# Altium PCB PCB1.PcbDoc
Units mm, origin at the board's own origin, x right, y up, seen from the top; angles counter-clockwise.
Board outline 60.4 x 38.1 mm, 4 copper layers (Top Layer, Internal Plane 1, Internal Plane 2, Bottom Layer), stack 1.537 mm thick; 83 components, 66 nets, 329 pads, 107 vias.
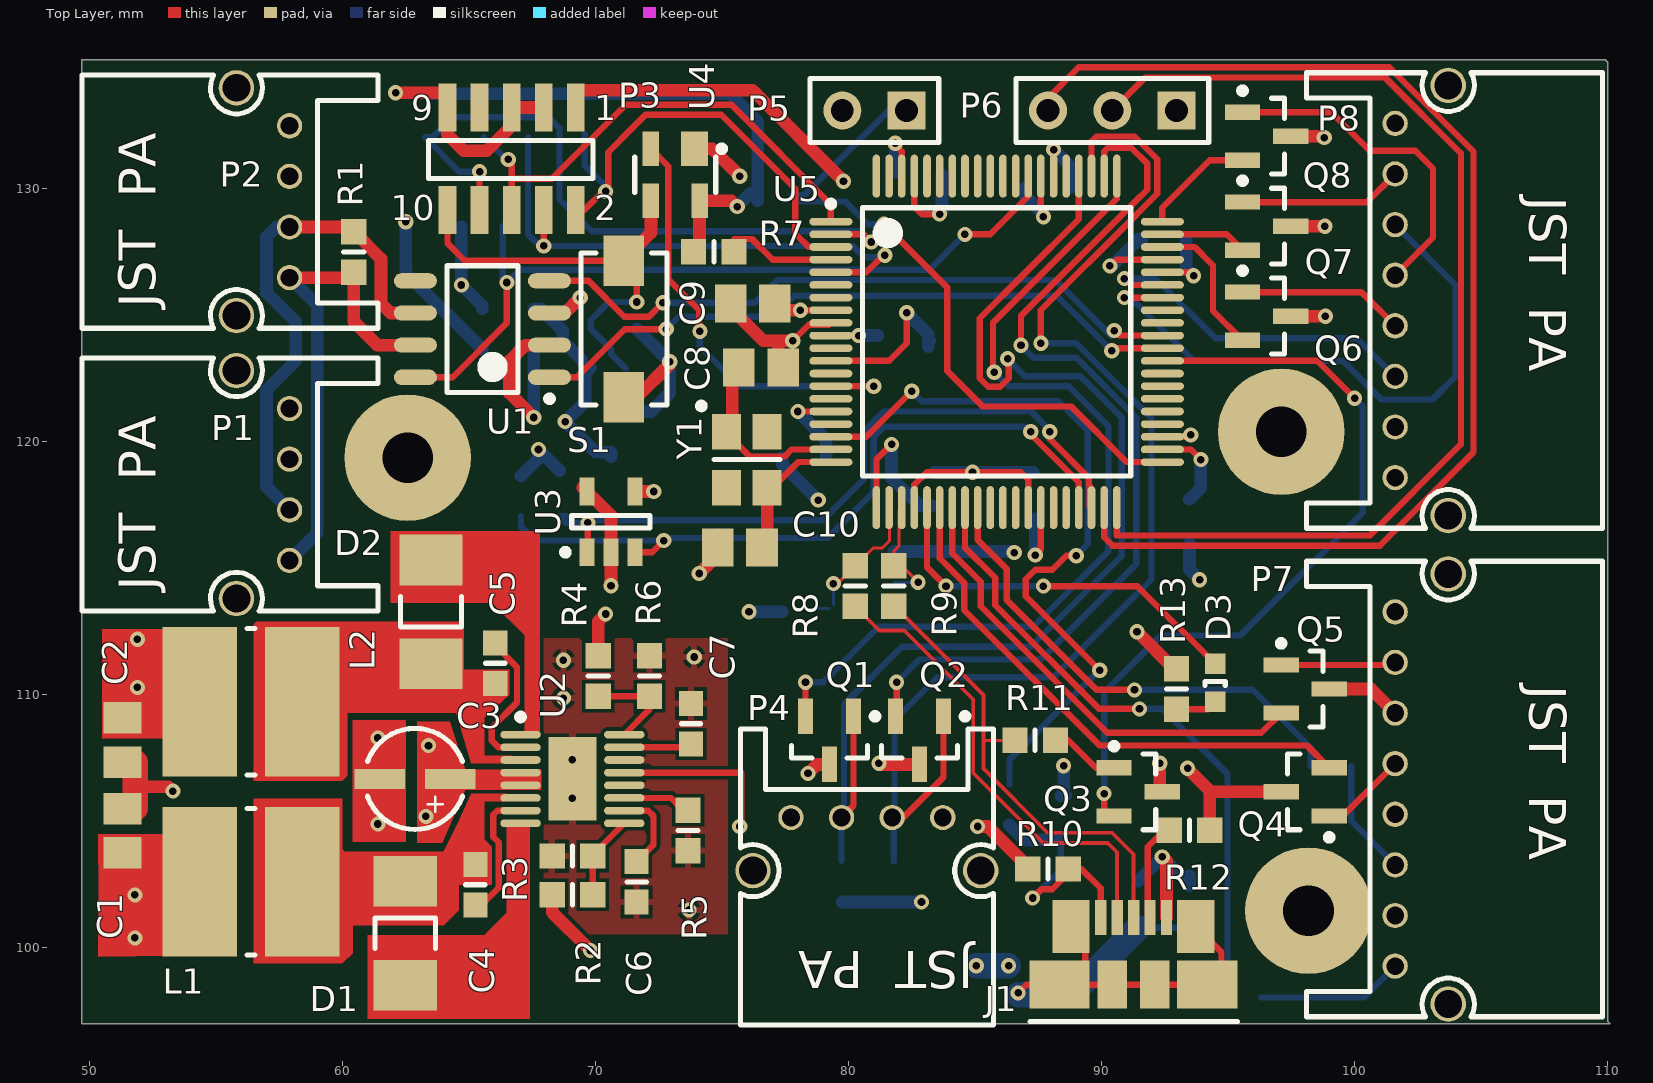
[diagram p0: Top Layer view]
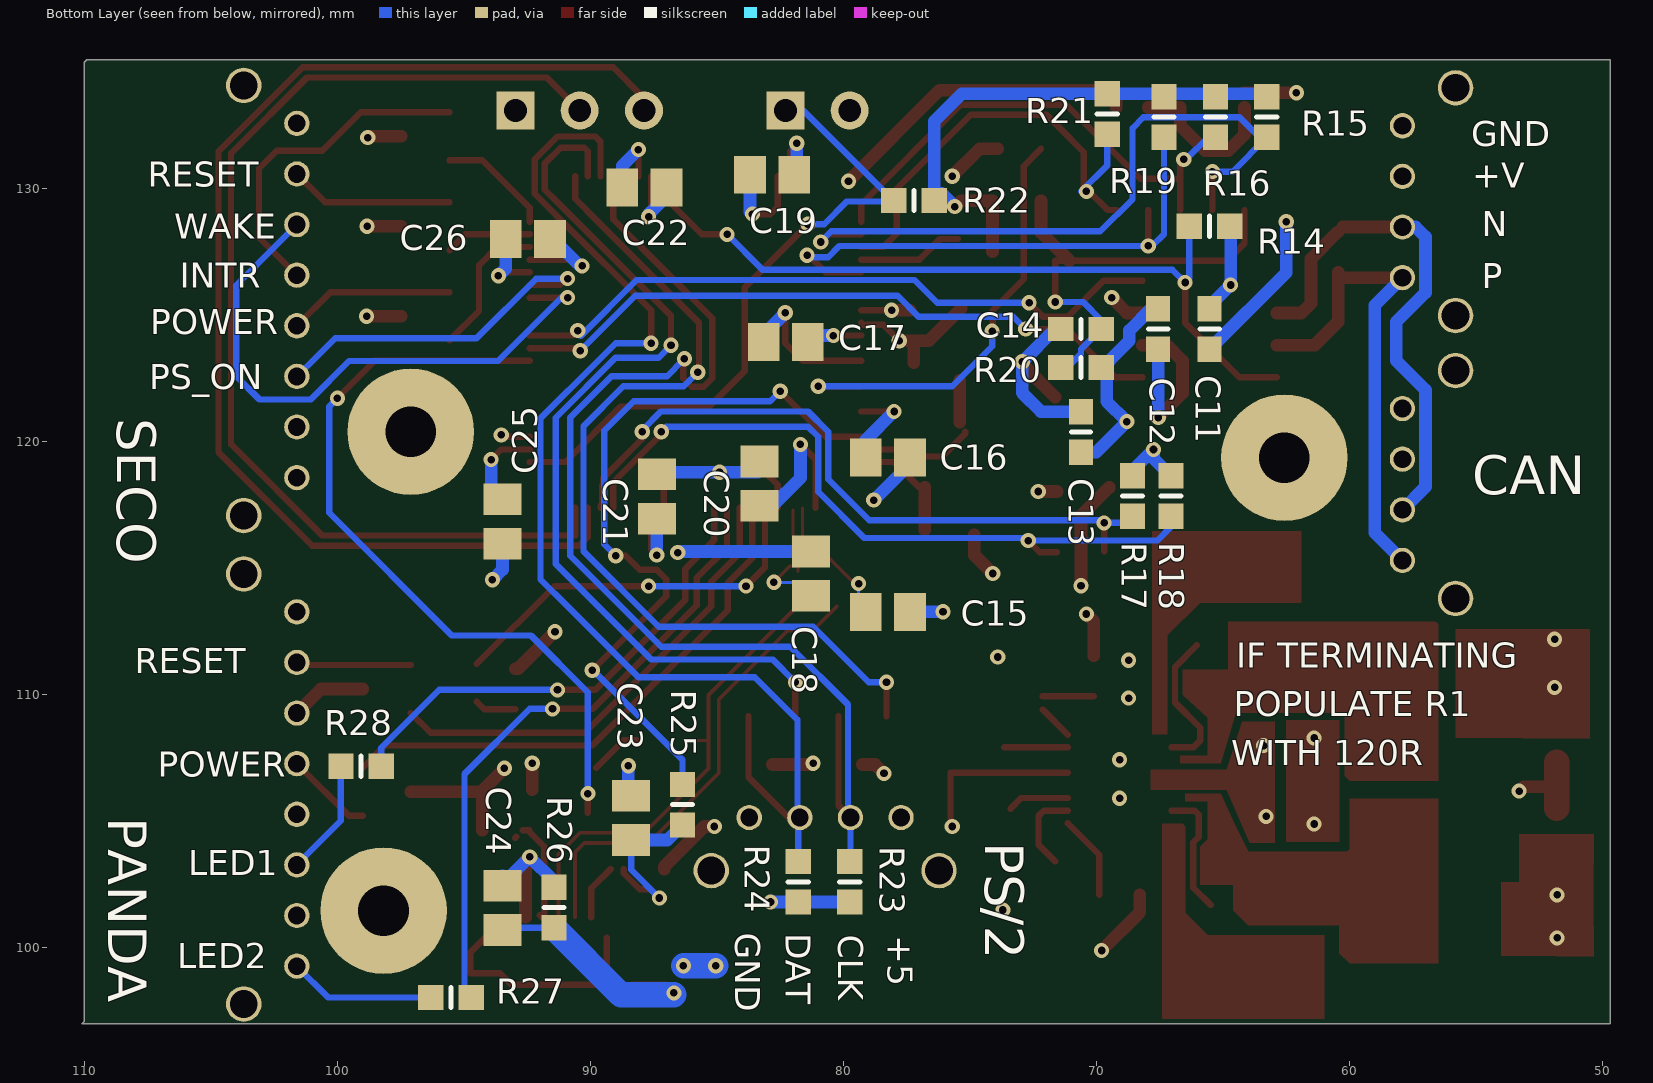
[diagram p1: Bottom Layer view, seen from below]
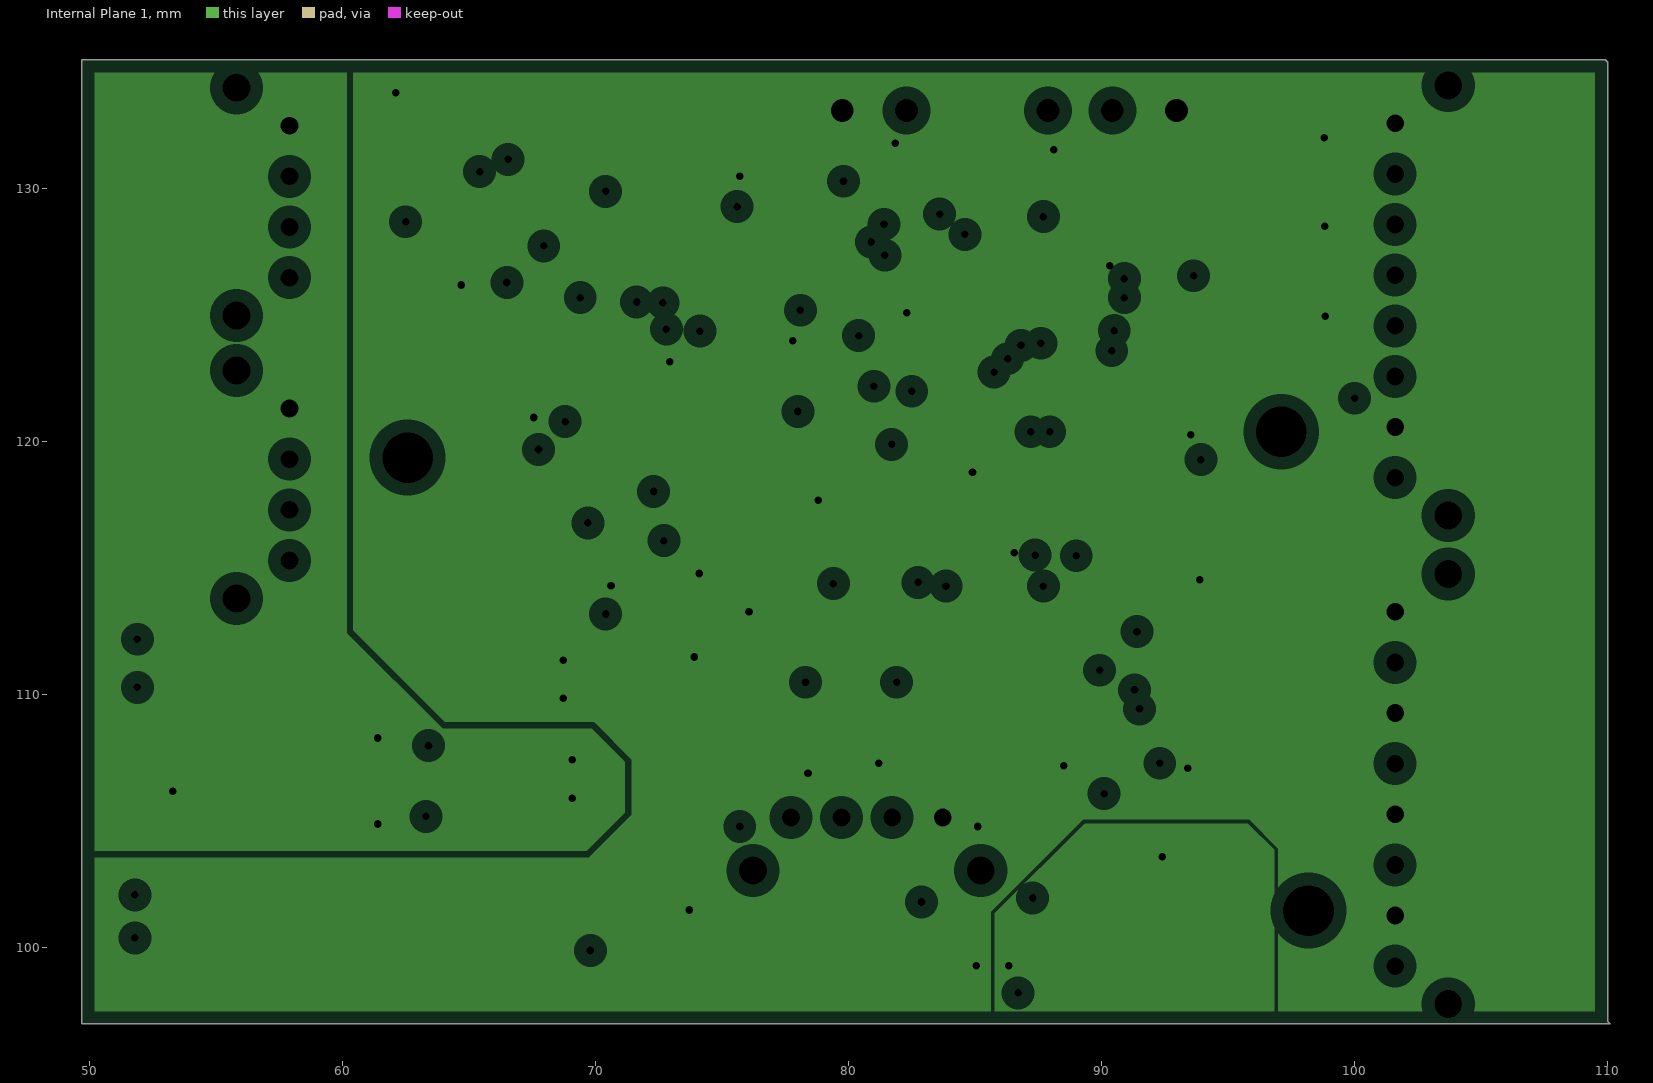
[diagram p2: Internal Plane 1, clearances drawn from the general rule]
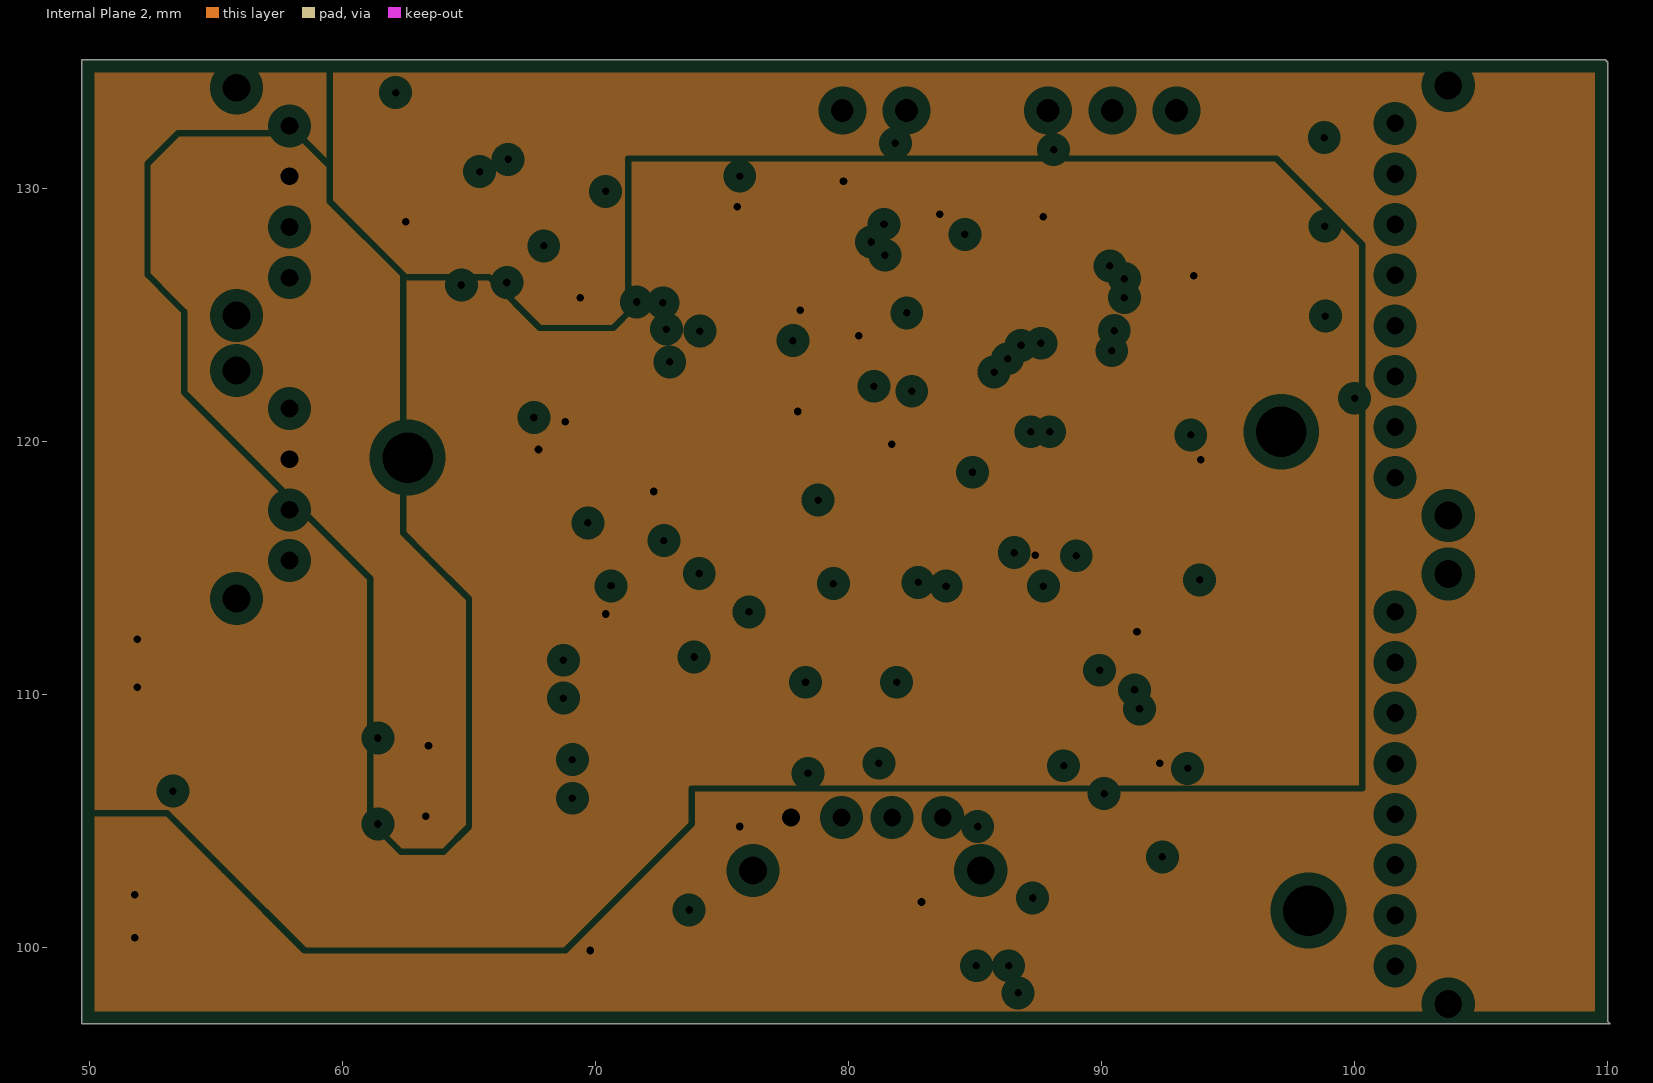
[diagram p3: Internal Plane 2, clearances drawn from the general rule]

## Layer stack, top to bottom
Top Layer: signal copper 0.018
Dielectric: core 0.22, FR-4, Dk 4.2
Internal Plane 1: plane copper 0.035, net GND
Dielectric: prepreg 0.9906, FR-4, Dk 4.55
Internal Plane 2: plane copper 0.035, net (Multiple Nets)
Dielectric: core 0.22, FR-4, Dk 4.2
Bottom Layer: signal copper 0.018

## Board outline
110.1,97 110,97.1 110,135 109.9,135.1 49.7,135.1 49.7,97

## Design rules (kind name [scope] priority, off if disabled: settings)
Clearance [All] p1: gap=0.15
DiffPairsRouting [All] p1: maxlimit=0.254 minlimit=0.254 mostfreqgap=0.254 maxuncoupledlength=12.7
MinimumAnnularRing [All] p1: minimumring=0.125
MinimumSolderMaskSliver [All] p1: minsoldermaskwidth=0.125
PlaneClearance [All] p1: clearance=0.5
PlaneConnect [All] p1: planeconnectstyle=Relief reliefexpansion=0.508 reliefentries=4 reliefconductorwidth=0.254 reliefairgap=0.254
PolygonConnect [All] p1: connectstyle=Relief reliefconductorwidth=0.254 reliefentries=4 polygonreliefangle="90 Angle"
RoutingVias [All] p1: holewidth=0.3 width=0.6 viastyle="Through Hole" minholewidth=0.3 minwidth=0.6 maxholewidth=0.3 maxwidth=0.6
SilkToSilkClearance [All] p1: silktosilkclearance=0.125
SilkscreenOverComponentPads [All] p1: minsilkscreentomaskgap=0.15
SolderMaskExpansion [All] p1: expansion=0.125
Width USB [InNetClass('Usb')] p1: maxlimit=0.154 minlimit=0.112 preferedwidth=0.119 impedancedriven=TRUE minimp=82.000000 maximp=92.000000 favimp=90.000000
Width CAN_POWER [InNet('CAN_POWER')] p2: maxlimit=10 minlimit=0.15 preferedwidth=2
Width power [InNetClass('Power')] p3: maxlimit=10 minlimit=0.25 preferedwidth=0.5
Width general [All] p4: maxlimit=10 minlimit=0.15 preferedwidth=0.25
22 further rules are at their usual default settings.

## Classes and differential pairs
component class U_PS2: P4 Q1 Q2 R23 R24
component class "U_Panda board header": P7 Q4 Q5 R27 R28
component class "U_SECO mobo header": P8 Q6 Q7 Q8 Q?
component class schematic: P6 U5
net class Usb: USB_C_N USB_C_P USB_H_N USB_H_P
net class Power: +3.3 +5 CAN_POWER GND
component class U_usb: C15 C18 C23 C24 D1 D3 J1 Q3 R8 R9 R10 R11 R12 R13 R25 R26
component class "U_Reset Supervisor": C12 C14 R20 U4
component class U_jtag: C8 C9 C10 C16 C17 C19 C20 C21 C22 C25 C26 P5 R7 R22 S1 Y1
component class "U_I2C 3": R17 R18
component class "U_Dual 5V+3": C1 C2 C3 C4 C5 C6 C7 D1 D2 L1 L2 R2 R3 R4 R5 R6 U2
component class "U_CAN Transciever": C11 R14 U1
component class "U_CAN Termination Connector (JST)": P1 P2 R1
component class "U_ARM JTAG Header": P3 R15 R16 R19 R21
component class "U_1KB I2C EEPROM": C13 U3 U4
differential pair USB_H: +USB_H_P -USB_H_N
differential pair USB_C: +USB_C_P -USB_C_N

## Components (designator, comment, footprint, x,y, rotation, side; value= is the part's Value field where it differs from the comment)
C1 "Cap" C0805 51.308,104.648 r90 top (schematic designator C5)
C2 "Cap" C0805 51.308,108.204 r270 top (schematic designator C4)
C3 "Cap Pol1" EEEHC1H2R2R 61.468,106.68 r270 top (schematic designator C1)
C4 "Cap" C0603 65.25,102.5 r270 top (schematic designator C3)
C5 "Cap" C0603 66.04,111.252 r90 top (schematic designator C2)
C6 "Cap" C0603 71.628,102.616 r270 top (schematic designator C7)
C7 "Cap" C0603 73.777,108.862 r90 top (schematic designator C6)
C8 "Cap" C0805 76.553,122.936 r0 top (schematic designator C6)
C9 "Cap" C0805 76.2,125.476 r180 top (schematic designator C8)
C10 "Cap" C0805 75.692,115.824 r180 top (schematic designator C5)
C11 "Cap" C0603 65.532,124.46 r90 bottom (schematic designator C1)
C12 "Cap" C0603 67.564,124.46 r270 bottom (schematic designator C1)
C13 "Cap" C0603 70.612,120.396 r90 bottom (schematic designator C1)
C14 "Cap" C0603 70.612,124.46 r0 bottom (schematic designator C2)
C15 "Cap" C0805 78.232,113.284 r180 bottom (schematic designator C33)
C16 "Cap" C0805 78.232,119.38 r180 bottom (schematic designator C10)
C17 "Cap" C0805 82.296,123.952 r0 bottom (schematic designator C1)
C18 "Cap" C0805 81.28,114.808 r90 bottom (schematic designator C34)
C19 "Cap" C0805 82.804,130.556 r180 bottom (schematic designator C9)
C20 "Cap" C0805 83.312,118.364 r90 bottom (schematic designator C7)
C21 "Cap" C0805 87.376,117.856 r90 bottom (schematic designator C3)
C22 "Cap" C0805 87.884,130.048 r0 bottom (schematic designator C4)
C23 "Cap" C0805 88.392,105.156 r90 bottom (schematic designator C32)
C24 "Cap" C0805 93.472,101.6 r90 bottom (schematic designator C35)
C25 "Cap" C0805 93.472,116.84 r270 bottom (schematic designator C2)
C26 "Cap" C0805 92.456,128.016 r180 bottom (schematic designator C11)
D1 "D Schottky" VS-10BQ030TRPBF 62.484,100.584 r90 top (schematic designator D2)
D2 "D Schottky" VS-10BQ030TRPBF 63.5,113.284 r270 top (schematic designator D1)
D3 "" LGQ971 94.488,109.728 r90 top
J1 "MICRO_USB_CONN" USB_MICRO_CONNECTOR 90.424,98.552 r90 top
L1 "Inductor" SDR0604-150YL 56.388,102.616 r180 top (schematic designator L2)
L2 "Inductor" SDR0604-150YL 56.388,109.728 r0 top (schematic designator L1)
P1 "Header 4" S04B-PASK-2 57.912,115.316 r90 top (schematic designator P2)
P2 "Header 4" S04B-PASK-2 57.912,126.492 r90 top (schematic designator P1)
P3 "Header 5X2" FTSH-105-01-L-DV 63.5,134.112 r270 top (schematic designator P1)
P4 "Header 4" S04B-PASK-2 83.724,105.156 r180 top
P5 "Header 2" HDR1X2 82.296,133.096 r180 top (schematic designator P2)
P6 "Header 3" HDR1X3 92.964,133.096 r180 top (schematic designator P1)
P7 "Header 4X2" S08B-PASK-2 101.6,113.284 r270 top (schematic designator P3)
P8 "Header 8" S08B-PASK-2 101.6,132.588 r270 top (schematic designator P5)
Q1 "MOSFET-N" 2N7002 79.248,108.204 r270 top (schematic designator Q5)
Q2 "MOSFET-N" 2N7002 82.804,108.204 r270 top (schematic designator Q3)
Q3 "MOSFET-P" bsh201 91.44,106.172 r0 top (schematic designator Q2)
Q4 "MOSFET-N" 2N7002 98.044,106.172 r180 top (schematic designator Q1)
Q5 "MOSFET-N" 2N7002 98.044,110.236 r0 top (schematic designator Q2)
Q6 "MOSFET-N" 2N7002 96.52,124.968 r0 top (schematic designator Q4)
Q7 "MOSFET-N" 2N7002 96.52,128.524 r0 top
Q8 "MOSFET-N" 2N7002 96.52,132.08 r0 top (schematic designator Q6)
R1 "Res2" R0603 60.452,127.508 r90 top
R2 "Res" R0603 69.088,102.108 r180 top
R3 "Res" R0603 69.088,103.632 r0 top (schematic designator R4)
R4 "Res" R0603 70.104,110.744 r90 top (schematic designator R1)
R5 "Res" R0603 73.66,104.648 r90 top
R6 "Res" R0603 72.136,110.744 r270 top (schematic designator R3)
R7 "Res1" R0603 74.676,127.508 r180 top (schematic designator R1)
R8 "Res" R0603 80.264,114.3 r270 top (schematic designator R26)
R9 "Res" R0603 81.788,114.3 r270 top (schematic designator R25)
R10 "Res" R0603 87.884,103.124 r0 top (schematic designator R21)
R11 "Res" R0603 87.376,108.204 r0 top (schematic designator R24)
R12 "Res1" R0603 93.472,104.648 r0 top (schematic designator R30)
R13 "Res" R0603 92.964,110.236 r90 top (schematic designator R22)
R14 "Res" R0603 65.532,128.524 r0 bottom (schematic designator R1)
R15 "Res" R0603 63.268,132.836 r90 bottom (schematic designator R3)
R16 "Res" R0603 65.3,132.836 r90 bottom (schematic designator R4)
R17 "Res" R0603 68.58,117.856 r90 bottom (schematic designator R2)
R18 "Res" R0603 67.056,117.856 r90 bottom (schematic designator R1)
R19 "Res" R0603 67.332,132.836 r90 bottom (schematic designator R2)
R20 "Res" R0603 70.612,122.936 r180 bottom (schematic designator R1)
R21 "Res" R0603 69.576,132.96 r90 bottom (schematic designator R1)
R22 "Res" R0603 77.216,129.54 r180 bottom (schematic designator R2)
R23 "Res1" R0603 79.756,102.616 r270 bottom (schematic designator R6)
R24 "Res1" R0603 81.788,102.616 r270 bottom (schematic designator R5)
R25 "Res" R0603 86.36,105.664 r270 bottom (schematic designator R23)
R26 "Res" R0603 91.44,101.6 r270 bottom (schematic designator R27)
R27 "Res1" R0603 95.504,98.044 r0 bottom (schematic designator R3)
R28 "Res1" R0603 99.06,107.188 r0 bottom (schematic designator R4)
S1 "SW-PB" DTSM-32S-B 71.12,124.46 r90 top
U1 "MCP2551" MCP2551 65.532,124.46 r180 top
U2 "LT3509" LT3509 69.088,106.68 r0 top (schematic designator U1)
U3 "24AA08T-I/OT" 24AA08T-I/OT 70.612,116.84 r90 top (schematic designator U1)
U4 "STM811" STM811 73.152,130.556 r270 top (schematic designator U1)
U5 "LPC1758" LPC1758FBD80 85.852,123.952 r0 top (schematic designator U1)
Y1 "XTAL" C3E-24.000-12-3030-X 75.184,120.396 r270 top

## Footprints (in the part's own frame and the unit in brackets; to place one, negate y for a bottom-side part, rotate by r counter-clockwise, add the part's x,y. Pads: shape width x height; smd on the part's side, far side on the other; paste and mask are expansions set on the pad)
2N7002 [mm] "N channel MOSFET"
  rect 1.4x0.6 smd: 1(-0.95,0.95) 2(-0.95,-0.95) 3(0.95,0)
  silkscreen extent -1.07,-1.5 0.7,1.93, body extent -0.7,-1.5 0.7,1.5, height 1.1
24AA08T-I/OT [mm] "MICROCHIP - 24AA08T-I/OT - EEPROM SERIAL 8KB, SMD, SOT-23-5"
  rect 1.1x0.6 smd mask+0.18: 1(-1.2,0.95) 2(-1.2,0) 3(-1.2,-0.95)
  rect 1.1x0.6 smd: 4(1.2,-0.95) 5(1.2,0.95)
  silkscreen extent -1.32,-1.55 0.25,1.92, body extent -0.87,-1.55 0.87,1.55, height 1.45
bsh201 [mm]
  rect 1.4x0.6 smd: 1(-0.95,0.95) 2(-0.95,-0.95) 3(0.95,0)
  silkscreen extent -1.07,-1.5 0.7,1.92, body extent -0.7,-1.5 0.7,1.5, height 1.1
C3E-24.000-12-3030-X [mm]
  rect 1.4x1.15 smd: 1(0,0) 2(2.2,1.6) 3(2.2,0) 4(0,1.6)
  silkscreen extent -1.15,-1.12 1.1,2.1, body extent -0.6,-0.5 2.8,2.1, height 0.75
C0603 [mm] "Chip Capacitor, 2-Leads, Body 1.6x0.8mm, IPC Medium Density"
  rect 1x0.95 smd: 1(-0.8,0) 2(0.8,0)
  silkscreen extent 0,-0.38 0,0.38, body extent -0.88,-0.48 0.87,0.48, height 0.8
C0805 [mm] "KEMET - C0805C104K5RACTU - CAPACITOR, 0805, 100NF, 50V, X7R"
  rect 1.25x1.5 smd: 1(-0.889,0) 2(0.861,0)
  body extent -1.12,-0.72 1.09,0.72, height 1
DTSM-32S-B [mm] "MULTICOMP - DTSM-32S-B - TACTILE SWITCH, SPNO, SMD, 50MA"
  rect 2x1.6 smd: 1(-2.7,0) 2(2.7,0)
  silkscreen extent -3,-1.7 3,1.7, body extent -3.67,-1.75 3.67,1.75, height 2.08
EEEHC1H2R2R [mm] "PANASONIC - EEEHC1H2R2R - CAPACITOR, ELECTROLYTIC, 50V, 2.2UF"
  rect 0.8x2 smd: 1(0,2.8) 2(0,0)
  silkscreen extent -2,-0.48 2,3.28, body extent -2.15,-0.9 2.15,3.7, height 5.9
FTSH-105-01-L-DV [mm] "HEADER, 1.27MM, SMD, 10WAY"
  rect 1.9x0.7 smd: 1(0.9,5.725) 2(4.95,5.725) 3(0.9,4.456) 4(4.95,4.456) 5(0.9,3.187) 6(4.95,3.187) 7(0.9,1.919) 8(4.95,1.919) 9(0.9,0.65) 10(4.95,0.65)
  silkscreen extent 2.2,-0.1 3.7,6.4, body extent 0,0 5.84,6.35, height 5.97
HDR1X2 [mm] "Connector; Header; 2 Position"
  rect 1.5x1.5 hole 0.9: 1(0,0)
  round 1.5 hole 0.9: 2(2.54,0)
  silkscreen extent -1.27,-1.27 3.81,1.27
HDR1X3 [mm] "Connector; Header; 3 Position"
  rect 1.5x1.5 hole 0.9: 1(0,0)
  round 1.5 hole 0.9: 2(2.54,0) 3(5.08,0)
  silkscreen extent -1.27,-1.27 6.35,1.27
LGQ971 [mm] "OSRAM - LGQ971 - LED, SMD, GREEN"
  rect 0.8x0.8 smd: 1(0,0) 2(1.5,0)
  silkscreen extent 0.65,-0.4 0.8,0.4, body extent 0.02,-0.4 1.42,0.4, height 0.9
LPC1758FBD80 [mm] "LPC1758FBD80"
  oval 1.7x0.3 smd: 1(-6.55,4.75) 2(-6.55,4.25) 3(-6.55,3.75) 4(-6.55,3.25) 5(-6.55,2.75) 6(-6.55,2.25) 7(-6.55,1.75) 8(-6.55,1.25) 9(-6.55,0.75) 10(-6.55,0.25) 11(-6.55,-0.25) 12(-6.55,-0.75) 13(-6.55,-1.25) 14(-6.55,-1.75) 15(-6.55,-2.25) 16(-6.55,-2.75) 17(-6.55,-3.25) 18(-6.55,-3.75) 19(-6.55,-4.25) 20(-6.55,-4.75) 41(6.55,-4.75) 42(6.55,-4.25) 43(6.55,-3.75) 44(6.55,-3.25) 45(6.55,-2.75) 46(6.55,-2.25) 47(6.55,-1.75) 48(6.55,-1.25) 49(6.55,-0.75) 50(6.55,-0.25) 51(6.55,0.25) 52(6.55,0.75) 53(6.55,1.25) 54(6.55,1.75) 55(6.55,2.25) 56(6.55,2.75) 57(6.55,3.25) 58(6.55,3.75) 59(6.55,4.25) 60(6.55,4.75)
  oval 0.3x1.7 smd: 21(-4.75,-6.55) 22(-4.25,-6.55) 23(-3.75,-6.55) 24(-3.25,-6.55) 25(-2.75,-6.55) 26(-2.25,-6.55) 27(-1.75,-6.55) 28(-1.25,-6.55) 29(-0.75,-6.55) 30(-0.25,-6.55) 31(0.25,-6.55) 32(0.75,-6.55) 33(1.25,-6.55) 34(1.75,-6.55) 35(2.25,-6.55) 36(2.75,-6.55) 37(3.25,-6.55) 38(3.75,-6.55) 39(4.25,-6.55) 40(4.75,-6.55) 61(4.75,6.55) 62(4.25,6.55) 63(3.75,6.55) 64(3.25,6.55) 65(2.75,6.55) 66(2.25,6.55) 67(1.75,6.55) 68(1.25,6.55) 69(0.75,6.55) 70(0.25,6.55) 71(-0.25,6.55) 72(-0.75,6.55) 73(-1.25,6.55) 74(-1.75,6.55) 75(-2.25,6.55) 76(-2.75,6.55) 77(-3.25,6.55) 78(-3.75,6.55) 79(-4.25,6.55) 80(-4.75,6.55)
  silkscreen extent -6.67,-5.3 5.3,5.57, body extent -6,-6 6,6, height 1.6
LT3509 [mm] "LT3509"
  oval 1.6x0.3 smd: 1(-2.05,1.75) 2(-2.05,1.25) 3(-2.05,0.75) 4(-2.05,0.25) 5(-2.05,-0.25) 6(-2.05,-0.75) 7(-2.05,-1.25) 8(-2.05,-1.75) 9(2.05,-1.75) 10(2.05,-1.25) 11(2.05,-0.75) 12(2.05,-0.25) 13(2.05,0.25) 14(2.05,0.75) 15(2.05,1.25) 16(2.05,1.75)
  rect 1.9x3.3 smd: 17(0,0)
  silkscreen extent -2.17,2.33 -1.92,2.57, body extent -1.55,-2.07 1.55,2.07, height 1.1
MCP2551 [mm]
  oval 1.7x0.6 smd: 1(-2.65,1.905) 2(-2.65,0.635) 3(-2.65,-0.635) 4(-2.65,-1.905) 5(2.65,-1.905) 6(2.65,-0.635) 7(2.65,0.635) 8(2.65,1.905)
  silkscreen extent -2.78,-2.5 1.4,2.88, body extent -1.99,-2.5 1.99,2.5, height 1.75
R0603 [mm]
  rect 1x1 smd: 1(-0.8,0) 2(0.8,0)
  silkscreen extent 0,-0.4 0,0.4, body extent -0.85,-0.48 0.85,0.47, height 0.45
S04B-PASK-2 [mm] "JST (JAPAN SOLDERLESS TERMINALS) - S04B-PASK-2 - HEADER, PA, 4WAY, SIDE, 2MM"
  round 1 hole 0.7: 1(6,0) 2(4,0) 3(2,0) 4(0,0)
  round 1.4 hole 1.1: ""(-1.5,2.1) ""(7.5,2.1)
  silkscreen extent -2,-3.5 8,8.2, body extent -2,-3.5 8,8.2, height 6.5
S08B-PASK-2 [mm] "JST (JAPAN SOLDERLESS TERMINALS) - S08B-PASK-2 - HEADER, PA, 8WAY, SIDE, 2MM"
  round 1 hole 0.7: 1(14,0) 2(12,0) 3(10,0) 4(8,0) 5(6,0) 6(4,0) 7(2,0) 8(0,0)
  round 1.4 hole 1.1: ""(-1.5,2.1) ""(15.5,2.1)
  silkscreen extent -2,-3.5 16,8.2, body extent -2,-3.5 16,8.2, height 6.5
SDR0604-150YL [mm] "BOURNS - SDR0604-150YL - INDUCTOR, SMD, 15UH, 1.6A"
  rect 2.95x5.9 smd: 1(-2.025,0) 2(2.025,0)
  silkscreen extent -0.15,-2.9 0.15,2.9, body extent -2.9,-2.88 2.9,2.92, height 4.8
STM811 [mm] "SOT143, 4-Leads, Body 3.0x2.6mm (max), Pitch 1.92mm, IPC Medium Density"
  rect 1.35x1.05 smd: 1(-1.025,0.76)
  rect 1.35x0.65 smd: 2(-1.025,-0.96) 3(1.025,-0.96) 4(1.025,0.96)
  silkscreen extent -1.15,-1.6 0.7,1.96, body extent -0.7,-1.52 0.7,1.52, height 1.12
USB_MICRO_CONNECTOR [mm] "MOLEX - 47346-0001 - RECEPTACLE, MICRO USB B, BOTTOM MOUNT"
  rect 1.38x0.45 smd: 1(2.66,0.46) 2(2.66,-0.19) 3(2.66,-0.84) 4(2.66,-1.49) 5(2.66,-2.14)
  rect 1.9x2.375 smd mask+0.16: 6(0,2.08) 6(0,-3.75)
  rect 1.9x1.175 smd mask+0.16: 6(0,0) 6(0,-1.68)
  rect 2.1x1.475 smd mask+0.16: 6(2.3,1.63) 6(2.3,-3.3)
  silkscreen extent -1.45,-4.94 -1.45,3.26, body extent -2.23,-4.81 3.2,3.17, height 2.69
VS-10BQ030TRPBF [mm] "VISHAY FORMERLY I.R. - VS-10BQ030TRPBF - DIODE, SCHOTTKY, 1A, 30V"
  rect 2x2.5 smd: 1(-2.05,0) 2(2.05,0)
  silkscreen extent -0.6,-1.2 0.6,1.2, body extent -2.2,-1.8 2.2,1.8, height 2.4

## Part data
C1 C2 C4 C5 C6 C7 C8 C9 C10 C11 C12 C13 C14 C15 C16 C17 C18 C19 C20 C21 C22 C23 C24 C25 C26: "Capacitor"
C3: "Polarized Capacitor (Radial)"
D1 D2: "Schottky Diode"
D3: library part LED2, "Typical RED, GREEN, YELLOW, AMBER GaAs LED"
J1: "MOLEX - 47346-0001 - RECEPTACLE, MICRO USB B, BOTTOM MOUNT"
P1 P2 P4: "Header, 4-Pin"
P3: "Header, 5-Pin, Dual row"
P5: "Header, 2-Pin"
P6: "Header, 3-Pin"
P7: "Header, 4-Pin, Dual row"
P8: "Header, 8-Pin"
Q1 Q2 Q4 Q5 Q6 Q7 Q8: "N-Channel MOSFET"
Q3: "P-Channel MOSFET"
R1 R7 R12 R23 R24 R27 R28: "Resistor"
R2 R3 R4 R5 R6 R8 R9 R10 R11 R13 R14 R15 R16 R17 R18 R19 R20 R21 R22 R25 R26: library part Res2, "Resistor"
S1: "Switch"
U1: "High-speed CAN Transceiver, 1Mb/s"
U3: "MICROCHIP - 24AA08T-I/OT - EEPROM SERIAL 8KB, SMD, SOT-23-5"
U4: "STMICROELECTRONICS - STM811TW16F - MPU LOW RESET 3.08V, SOT-143-4, 811"
U5: "NXP - LPC1758FBD80 - MCU, 32BIT, ARM CORTEX M3, 80LQFP"
Y1: "Crystal Oscillator"

## Free pads (board coordinates)
  round 5 hole 2: 2(98.175,101.475) 3(97.1,120.4) 4(62.575,119.375)

## Via types
v1: diameter 0.6, hole 0.3, Top Layer to Bottom Layer, tented both sides, 104 vias
v2: diameter 0.6, hole 0.3, Top Layer to Bottom Layer, 3 vias

## Nets (pads, with @x,y where several pads share a name; then routed paths per layer and width w, separated by ;. In a path a pad name is that pad's centre, name@x,y a point inside that pad or via, vN(x,y) a via of type N, cw(c..) or ccw(c..) an arc to the next point about the centre after c; other vN are vias at no path point)
+3.3: C2.1 C9.1 C12.1 C13.1 C16.1 C17.1 C19.1 C20.1 C21.1 C22.1 C25.1 C26.1 L2.1 P3.1 Q3.3 R4.2 R7.2 R13.2 R15.2 R16.2 R17.2 R18.2 R19.2 R20.2 R21.2 R22.2 U3.4 U4.4 U5.8 U5.10 U5.16 U5.21 U5.34 U5.42 U5.56 U5.67 U5.77 | length 79.5
  Top Layer w0.25: v1(78,121.2) U5.16 ; v1(78.1,125.202) U5.8 ; U5.10 v1(80.398,124.202) ; U5.21 81.102,119.302 v1(81.7,119.9) ; U5.77 82.602,129.298 82.9,129 v1(83.6,129) ; v1(87.376,115.524) 87.602,115.75 U5.34 ; U5.67 87.602,128.998 v1(87.7,128.9) ; U5.42 93.523,119.702 v1(93.925,119.3) ; U5.56 93.498,126.702 v1(93.636,126.564)
  Top Layer w0.5: P3.1 69.225,133.825 69.3,133.9 76.2,133.9 v1(79.8,130.3) ; R4.2 70.104,112.904 v1(70.4,113.2) ; U3.4 v1(72.3,118.04) ; R7.2@74.112,127.525 U4.4 75.369,129.531 ; C9.1@77.363,125.202 v1(78.1,125.202) ; v1(91.4,112.5) 92.864,111.036 R13.2 ; Q3.3@92.3,106.262 v1(92.3,107.3)
  Bottom Layer w0.5: R15.2@63.392,133.76 67.332,133.76 R21.2 75.32,133.76 76.416,132.664 R22.2 ; R18.2 67.75,119.35 v1(67.75,119.7) R17.2@68.58,118.87 ; C12.1 67.84,125.26 68.7,124.4 68.7,124 R20.2@69.464,123.236 ; R20.2 69.6,122.724 69.6,121.6 v1(68.8,120.8) 70.004,119.596 C13.1 C13.1@70.612,119.424 ; v1(75.6,129.3) R22.2@76.128,129.828 ; v1(78,121.2) C16.1@79.121,120.079 ; C16.1 C16.1@79.121,119.921 ; v1(80.398,124.202) C17.1@81.157,124.202 ; v1(81.7,119.9) 81.7,118.579 82.804,117.475 C20.1 ; v1@83.693,129.093 C19.1 ; C22.1 86.995,129.695 v1@87.604,129.085 ; v1(87.376,115.524) C21.1 ; v1@87.606,129.085 87.607,129.086 87.618,129.086 87.7,129.004 v1(87.7,128.9) ; C26.1 93.345,126.855 v1(93.636,126.564) ; C25.1 93.925,118.182 v1(93.925,119.3)
  other v1: 51.9,110.3 51.9,112.2
+5: C1.1 C11.1 L1.2 P4.1 R2.2 R23.2 R24.2 U1.3 U2.13 | length 20.4
  Top Layer w0.25: U2.13 75.77,106.93 v1@75.77,104.93
  Top Layer w0.5: U1.3 68.795,125.095 v1(69.4,125.7) ; R2.2 68.288,101.412 v1(69.8,99.9)
  Bottom Layer w0.5: v1(62.5,128.7) 62.5,126.692 C11.1 ; R23.2 R24.2 v1(82.884,101.816)
  other v1: 51.8,100.4 51.8,102.1 75.7,104.8
CAN.CAN_N: P1.3 P2.3 R1.2 U1.6 | length 20.3
  Top Layer w0.5: P2.3 R1.2@60.268,128.492 ; R1.2 61.525,127.235 61.525,125.475 61.905,125.095 U1.6
  Bottom Layer w0.5: P1.3 57,118.228 57,122.05 58.15,123.2 58.15,124.75 57,125.9 57,128.1 57.392,128.492 P2.3
CAN.CAN_P: P1.4 P2.4 R1.1 U1.7 | length 19.2
  Top Layer w0.5: P2.4 R1.1@60.236,126.492 ; R1.1 60.452,124.748 61.375,123.825 U1.7
  Bottom Layer w0.5: P1.4 59,116.404 59,117.581 59,125.404 P2.4
CAN_POWER: C3.1 P1.2 P2.2 U2.4 U2.5
  other v1: 63.3,105.2 63.4,108
CAN_TTL.RXD: U1.4 U5.51 | length 26.6
  Top Layer w0.25: U1.4 69.726,126.365 71.141,124.95 72.115,124.95 v1(72.665,125.5) ; v1(90.5,124.4) 90.698,124.202 U5.51
  Bottom Layer w0.25: v1(72.665,125.5) 76.3,125.5 77.2,126.4 85.466,126.4 88.166,126.4 90.383,124.183 90.5,124.3 v1(90.5,124.4)
CAN_TTL.TXD: U1.1 U5.50 | length 26.5
  Top Layer w0.25: U1.1 69.255,122.555 71.157,124.457 v1(72.8,124.457) ; v1(90.4,123.6) 90.502,123.702 U5.50
  Bottom Layer w0.25: v1(72.8,124.457) v1@72.839,124.495 ; v1@72.8,124.5 72.834,124.5 v1@72.839,124.495 ; v1(90.4,123.6) 88.223,125.777 77.862,125.777 77.035,124.95 74.886,124.95 73.293,124.95 v1@72.839,124.495
GND: C1.2 C2.2 C3.2 C6.2 C7.2 C8.2 C9.2 C10.2 C11.2 C12.2 C13.2 C14.2 C15.2 C16.2 C17.2 C18.2 C19.2 C20.2 C21.2 C22.2 C23.2 C24.2 C25.2 C26.2 J1.5 P1.1 P2.1 P3.3 P3.5 P3.9 P4.4 P5.2 P6.1 P7.2 P7.4 P7.6 P7.8 P8.2 P8.8 Q1.3 Q2.3 Q4.3 Q5.3 Q6.3 Q7.3 Q8.3 R3.1 R5.1 R6.1 R10.1 R12.2 R14.1 R26.1 S1.1 U1.2 U2.12 U2.14 U2.17 U3.2 U3.5 U4.1 U5.9 U5.12 U5.24 U5.33 U5.43 U5.57 U5.66 U5.78 | length 107.5
  Top Layer w0.25: v1(77.799,124) 78.426,124.627 79.227,124.627 U5.9 ; U5.12 81.602,123.202 82.3,123.9 v1(82.3,125.1) ; v1(81.85,131.802) 81.85,131.737 82.102,131.484 U5.78 ; U5.24 82.602,118.3 83.1,118.798 86.802,118.798 87.102,118.498 U5.33 ; U5.66 v1(88.102,131.551) ; v1(90.329,126.956) 90.575,127.202 U5.57 ; U5.43 93.45,120.202 v1(93.526,120.277)
  Top Layer w0.5: 51.816,106.4 51.838,106.378 v1@53.122,106.378 ; v1(62.1,133.8) P3.9@64.175,133.8 ; P3.9 64.15,132.15 64.8,131.5 65.128,131.5 65.7,131.5 66.687,132.487 P3.5 P3.3 ; v1(67.564,120.964) 66.6,121.928 66.6,123.2 67.225,123.825 U1.2 ; U3.5@69.502,118.2 U3.5 70.612,117.09 U3.2 v1(70.612,114.312) ; S1.1@71.628,121.76 v1@72.936,123.068 ; U4.1 74.619,131.581 v1(75.7,130.5) ; v1(74.1,114.8) 74.831,115.531 C10.2@74.831,116.332 ; C9.2@75.339,125.285 76.624,124 77.229,124 ; C8.2@77.229,123.121 77.229,124 ; v1(77.799,124) 77.229,124 ; v1(78.4,106.9) 78.754,107.254 Q1.3 ; v1(81.2,107.3) 81.246,107.254 Q2.3 ; v1(85.1,104.8) 85.5,104.8 87.084,103.216 R10.1 ; J1.5 v1@92.564,103.436 ; v1(93.4,107.1) 94.328,106.172 Q4.3 ; R12.2 94.272,106.116 ; Q6.3 v1(98.843,124.968) ; Q8.3 v1@98.745,132.08 ; Q7.3 v1(98.825,128.525) ; Q5.3 100.648,110.236 P7.6
  Top Layer w1: C1.2@51.816,105.509 51.816,106.4 C2.2@51.816,107.343
  Bottom Layer w0.25: v1@81.8,131.752 v1(81.85,131.802) ; v1@88.102,131.502 v1(88.102,131.551)
  Bottom Layer w0.5: R14.1@64.7,128.492 v1(64.7,126.2) 65.532,125.368 C11.2 ; v1(67.564,120.964) C12.2 ; C13.2@70.968,121.196 C13.2 72.196,121.196 72.936,121.936 v1(72.936,123.164) C14.2@71.64,124.46 ; v1(76.066,113.284) C15.2 ; C16.2 77.371,119.129 v1(78.8,117.7) ; C18.2@81.788,115.669 86.506,115.669 v1(86.55,115.625) ; C19.2@81.85,130.649 v1(81.85,131.802) ; v1(82.3,125.1) C17.2@83.157,124.243 ; C17.2@83.157,123.761 C17.2 C17.2@83.2,123.995 ; C20.2@83.395,118.8 v1(84.9,118.8) C21.2@87.293,118.8 ; v1(88.102,131.551) 88.745,130.908 C22.2 ; v1(88.5,107.2) 88.5,106.125 C23.2 C23.2@88.583,106.017 ; v1(90.329,126.956) 90.414,126.956 91.474,128.016 C26.2 ; R26.1@91.44,102.64 v1(92.4,103.6) C24.2@93.472,102.528 ; C24.2 C24.2@93.472,102.528 ; C24.2@93.472,102.85 C24.2@93.472,102.528 ; C25.2 93.472,114.953 v1(93.875,114.55)
  Bottom Layer w1: v1(85.05,99.3) v1(86.325,99.3)
  other v1: 73.7,101.5 61.4,104.9 69.088,105.918 53.3,106.2 69.088,107.442 61.4,108.3 68.734,109.873 68.734,111.373 73.9,111.5 98.8,132.025
I2C.SCL: R17.1 U3.1 U5.38 | length 28
  Top Layer w0.25: U3.1@69.7,115.678 v1(69.7,116.8) ; v1(87.95,120.4) 87.95,120.117 89.502,118.565 89.502,118.303 89.527,118.278 89.527,117.425 89.538,117.425 89.602,117.489 U5.38
  Bottom Layer w0.25: R17.1@68.844,117.056 R17.1 68.836,116.8 v1(69.7,116.8) 69.734,116.8 69.834,116.9 78.975,116.9 80.6,118.525 80.6,120.4 81.4,121.2 87.213,121.2 87.95,120.463 v1(87.95,120.4)
I2C.SDA: R18.1 U3.3 U5.37 | length 29
  Top Layer w0.25: U3.3 72.24,115.64 v1(72.7,116.1) ; v1@87.2,120.302 89.102,118.4 U5.37
  Bottom Layer w0.25: R18.1 67.056,116.644 67.6,116.1 v1(72.7,116.1) ; v1@72.7,116.2 79.175,116.2 81,118.025 81,120.2 81.4,120.6 87,120.6 v1(87.2,120.4)
I\N\T\R\U\D\E\R: Q8.2 U5.60 | length 4.5
  Top Layer w0.25: U5.60 92.402,129.252 94.28,131.13 Q8.2
I\S\P\_\E\N\: P5.1 R22.1 U5.41 | length 26.2
  Top Layer w0.25: v1(81.4,128.6) 83.9,126.1 83.9,122.8 85.3,121.4 88.8,121.4 90.998,119.202 U5.41
  Bottom Layer w0.25: v1(81.4,128.6) 80.766,128.6 79.866,129.5 77.98,129.5 77.724,129.756 78.256,129.756 P5.1@81.596,133.096
NetC6_1: C10.1 U5.20 Y1.2 | length 4.6
  Top Layer w0.25: Y1.2 76.996,118.196 78.002,119.202 U5.20
  Top Layer w0.5: C10.1@76.784,116.535 Y1.2
NetC7_1: C8.1 U5.19 Y1.1 | length 6.3
  Top Layer w0.25: Y1.1 75.184,120.332 76.095,119.421 77.473,119.421 77.754,119.702 U5.19
  Top Layer w0.5: Y1.1@75.403,120.777 C8.1@75.403,122.428
NetC15_1: C24.1 J1.6 R26.2 | length 19.2
  Top Layer w0.25: v1(86.7,98.225) 87.027,98.552 J1.6@88.344,98.552 ; J1.6@89.36,100.402 89.36,98.552 93.12,98.552 93.57,99.002 94.74,99.002 94.74,99.836 94.601,99.975 J1.6@93.724,100.852
  Bottom Layer w0.25: R26.2 C24.1@93.383,100.8
  Bottom Layer w1: v1@86.7,98.15 88.79,98.15 R26.2
NetC18_1: C23.1 J1.1 R10.2 R25.2 | length 9.2
  Top Layer w0.25: v1(87.275,101.975) 87.625,102.325 88.05,102.325 88.684,102.959 R10.2 ; 89.201,103.124 89.964,102.361 J1.1
  Bottom Layer w0.25: v1(87.275,101.975) 88.392,103.092 C23.1
  Bottom Layer w0.5: R25.2 86.957,104.267 C23.1
NetC21_1: C5.1 D2.2 L2.2 U2.3
NetC21_2: C5.2 U2.2 | length 5.8
  Top Layer w0.25: C5.2@66.04,111.96 66.9,111.1 66.9,109.7 65.9,108.7 65.9,108.2 66.17,107.93 U2.2
NetC22_1: C4.1 D1.2 L1.1 U2.6
NetC22_2: C4.2 U2.7 | length 5.1
  Top Layer w0.25: C4.2@65.489,101.7 66.175,102.386 66.175,104.175 65.963,104.387 65.963,105.263 66.125,105.425 67.033,105.425 U2.7
NetC25_1: C7.1 U2.15 | length 2.5
  Top Layer w0.25: U2.15 C7.1@73.645,107.93
NetC26_1: C6.1 U2.10 | length 3.3
  Top Layer w0.25: U2.10 72.078,105.43 72.293,105.215 72.293,104.081 C6.1
NetD1_1: D3.1 R13.1 | length 1.6
  Top Layer w0.25: R13.1 94.196,109.436 D3.1
NetD2_1: D2.1 U2.1
NetD3_1: D1.1 U2.8
NetJ1_4: J1.4 R12.1 | length 4.2
  Top Layer w0.25: J1.4@92,101.298 J1.4 91.825,101.301 91.825,104 R12.1@92.473,104.648 ; R12.1@92.423,104.648 R12.1@92.473,104.648 ; R12.1 R12.1@92.473,104.648 ; R12.1@92.93,104.39 R12.1@92.975,104.345
NetP3_1: P7.1 R27.2 | length 5.8
  Bottom Layer w0.25: R27.2 100.36,98.044 P7.1
NetP3_3: P7.3 R28.2 | length 4.6
  Bottom Layer w0.25: R28.2 99.86,105.024 P7.3
NetP3_5: P7.5 Q4.1 | length 3.5
  Top Layer w0.25: Q4.1 99.538,105.222 P7.5
NetP3_7: P7.7 Q5.1 | length 4.4
  Top Layer w0.25: Q5.1 P7.7@101.502,111.186
NetP5_2: P6.2 U5.40 | length 43.3
  Top Layer w0.25: P6.2 91.728,134.4 101.2,134.4 104.2,131.4 104.2,125.75 104.2,119.9 100.6,116.3 90.6,116.3 90.6,116.398 90.602,116.4 U5.40
NetP5_3: P6.3 U5.39 | length 48.5
  Top Layer w0.25: P6.3 87.884,133.584 89.1,134.8 101.366,134.8 104.7,131.466 104.7,119.6 101,115.9 90.434,115.9 90.102,116.232 U5.39
NetP6_4: P8.4 Q6.1 | length 6.9
  Top Layer w0.25: Q6.1 100.27,125.918 P8.4 P8.4@101.406,124.394
NetP6_5: P8.5 Q8.1 | length 13.3
  Top Layer w0.25: Q8.1 99.07,133.03 100.6,131.5 102.4,131.5 103.1,130.8 103.1,128.088 P8.5
NetP6_7: P8.7 Q7.1 | length 6.5
  Top Layer w0.25: Q7.1 100.486,129.474 P8.7
NetQ5_1: Q3.1 R11.2 | length 2
  Top Layer w0.25: R11.2 88.684,108.204 89.766,107.122
NetR6_1: R7.1 U5.4 | length 4.2
  Top Layer w0.25: 75.476,128.016 76.184,128.016 76.998,127.202 U5.4
NetR21_1: R4.1 R6.2 U2.16 | length 3.4
  Top Layer w0.25: R4.1 R6.2 ; U2.16 72.136,109.428
NetR22_1: R2.1 R3.2 U2.9 | length 3.3
  Top Layer w0.25: R2.1 R3.2 ; R3.2@69.888,103.68 U2.9
NetR25_2: R5.2 U2.11 | length 2.4
  Top Layer w0.25: U2.11 72.97,105.93 R5.2@73.4,105.5
NRST: C14.1 P3.10 R20.1 S1.2 U4.3 | length 18.1
  Top Layer w0.25: P3.10 64.15,127.85 64.84,127.16 71.628,127.16 v1(71.628,125.528)
  Top Layer w0.5: S1.2@71.075,127.16 72.192,128.277 U4.3
  Bottom Layer w0.25: R20.1@71.2,122.9 70.612,123.488 70.612,123.66 C14.1 69.812,124.812 70.528,125.528 v1(71.628,125.528)
POWER_BTN_PANDA: Q4.2 U5.26 | length 21.5
  Top Layer w0.25: U5.26 83.602,115.398 84.575,114.425 84.575,113.35 89.925,108 98.116,108 Q4.2
POWER_BTN_SECO: Q6.2 U5.58 | length 5.7
  Top Layer w0.25: U5.58 93.675,127.702 94.4,126.977 94.4,125.188 Q6.2
PS2.CLK: P4.2 Q1.1 R23.1 U5.64 | length 46.6
  Top Layer w0.25: P4.2 80.198,105.63 Q1.1 ; v1@86.241,123.33 v1(86.285,123.285) 86.33,123.241 86.33,122.517 85.993,122.18 85.517,122.18 85.18,122.517 85.18,124.88 86.975,126.675 89.102,128.802 U5.64
  Bottom Layer w0.25: R23.1@79.724,103.448 P4.2 ; P4.2@79.82,105.156 79.82,109.62 82.1,111.9 87.2,111.9 90.8,115.5 90.8,120.966 89.166,122.6 86.971,122.6 86.33,123.241 v1(86.285,123.285)
PS2.CLK_PULL: Q1.2 U5.61 | length 35.6
  Top Layer w0.25: Q1.2@78.3,109.156 v1(78.3,110.5) ; v1(85.755,122.755) 85.71,122.8 85.71,124.71 89.7,128.7 90.602,129.602 U5.61
  Bottom Layer w0.25: v1(78.3,110.5) 79,110.5 81.2,112.7 87.3,112.7 90.275,115.675 90.275,120.625 88.7,122.2 87.7,122.2 86.31,122.2 85.8,122.71 v1(85.755,122.755)
PS2.DATA: P4.3 Q2.1 R24.1 U5.63 | length 48.3
  Top Layer w0.25: P4.3@82.156,105.156 83.754,106.754 Q2.1 ; v1(87.6,123.9) 87.6,124.034 87.6,125.201 91.2,128.801 91.526,129.127 ; U5.63 89.602,131.868 89.805,132.071 91.295,132.071 92.2,131.166 92.2,129.8 91.527,129.127
  Bottom Layer w0.25: R24.1 P4.3@81.788,105.092 ; P4.3@81.82,105.156 81.82,109.02 83.5,110.7 88.1,110.7 90.884,113.484 91.975,114.575 91.975,120.922 89.697,123.2 89.3,123.597 88.997,123.9 v1@87.5,123.9
PS2.DATA_PULL: Q2.2 U5.62 | length 36.5
  Top Layer w0.25: Q2.2@81.9,109.2 v1(81.9,110.5) ; v1(86.816,123.816) 86.816,123.929 86.816,124.982 90.8,128.967 91.36,129.527 ; U5.62 90.102,131.485 90.244,131.627 91.173,131.627 91.8,131 91.8,129.966 91.361,129.527
  Bottom Layer w0.25: v1(81.9,110.5) 82.8,111.4 87.6,111.4 89.535,113.335 91.375,115.175 91.375,120.956 89.007,123.325 87.307,123.325 v1(86.816,123.816)
PS_ON: P8.3 U5.55 | length 13.9
  Top Layer w0.25: v1(90.9,126.452) 90.963,126.452 91.213,126.202 U5.55
  Bottom Layer w0.25: v1(90.9,126.452) 90.963,126.452 92.148,126.452 94.5,124.1 95.5,124.1 100.088,124.1 100.7,123.488 100.84,123.348 P8.3
R\E\S\E\T\_OUTPUT: U4.2 U5.14 | length 17.7
  Top Layer w0.25: U4.2 72.875,130.898 72.875,126.425 74.1,125.2 v1@74.1,124.5 ; U5.14 v1@80.998,122.202
  Bottom Layer w0.25: v1(74.125,124.375) 74.125,123.775 75.7,122.2 v1(81,122.2)
RESET_BTN_PANDA: Q5.2 U5.27 | length 18.6
  Top Layer w0.25: U5.27 84.102,115.598 85.225,114.475 85.225,113.5 90.225,108.5 96.308,108.5 Q5.2
RESET_BTN_SECO: Q7.2 U5.59 | length 3.4
  Top Layer w0.25: U5.59 94.942,128.202 Q7.2
STANDBY: R14.2 U1.8 U5.68 | length 31
  Top Layer w0.25: U1.8 64.355,122.555 66.5,124.7 v1(66.5,126.3) ; v1(84.6,128.2) 85.601,128.2 87.102,129.701 U5.68
  Bottom Layer w0.25: v1@66.332,126.468 R14.2 ; v1(66.5,126.3) 67,126.8 83.2,126.8 v1(84.6,128.2)
STATUS_LED1: R27.1 U5.28 | length 25.2
  Top Layer w0.25: U5.28 84.602,115.823 85.8,114.625 85.8,113.55 89.9,109.45 v1(91.5,109.45)
  Bottom Layer w0.25: v1(91.5,109.45) 92.4,109.45 94.975,106.875 94.975,98.315 R27.1
STATUS_LED2: R28.1 U5.29 | length 19.3
  Top Layer w0.25: U5.29 85.102,116.123 86.25,114.975 86.25,113.75 89.8,110.2 v1(91.3,110.2)
  Bottom Layer w0.25: v1(91.3,110.2) 95.975,110.2 98.26,107.915 R28.1
TCK: P3.4 R19.1 U5.5 | length 22.1
  Top Layer w0.25: v1(67.956,127.744) P3.4 ; U5.5 80.702,126.702 81.4,127.4 81.461,127.4 v1(81.436,127.375)
  Bottom Layer w0.25: R19.1 67.332,128.202 v1@67.791,127.744 ; v1(67.956,127.744) 80.156,127.744 80.6,127.3 81.361,127.3 v1(81.436,127.375)
TDI: P3.8 R15.1 U5.2 | length 27.6
  Top Layer w0.25: P3.8 v1(65.419,130.681) ; U5.2 80.598,128.202 v1(80.9,127.9)
  Bottom Layer w0.25: v1(65.419,130.681) 64.623,130.681 R15.1 63.561,132.036 64.35,132.825 68.15,132.825 68.575,132.4 68.575,129.594 69.85,128.319 80.481,128.319 v1(80.9,127.9)
TDO: P3.6 R16.1 U5.1 | length 19.7
  Top Layer w0.25: v1(66.55,131.163) 66.55,131.037 v1@66.687,130.9 ; P3.6 66.687,129.987 66.687,130.4 ; v1@66.687,131.026 v1@66.687,130.9 ; U5.1 79.302,129.398 75.375,133.325 71.2,133.325 68.275,130.4 66.687,130.4 ; 66.687,130.4 v1@66.687,130.9
  Bottom Layer w0.25: R16.1@65.589,132.036 66.463,131.163 v1(66.55,131.163)
TMS: P3.2 R21.1 U5.3 | length 18.5
  Top Layer w0.25: P3.2 69.562,129.162 70.3,129.9 70.5,130.1 70.5,131.447 71.54,132.487 71.978,132.925 74.975,132.925 77.897,130.003 77.897,128.23 78.427,127.7 U5.3@79.3,127.7
  Bottom Layer w0.25: R21.1@69.576,132.16 69.576,130.924 v1@70.6,129.9 ; v1(70.4,129.9) v1@70.6,129.9
USB_C_N: J1.2 R8.2 | length 18.6
  Top Layer w0.15: R8.2 81.214,112.55 82.2,112.55 84.927,109.823 84.927,106.92 87.695,104.152 90.245,104.152 90.614,103.783 J1.2
USB_C_P: J1.3 R9.2 R11.1 | length 18.4
  Top Layer w0.119: 85.36,108.204 86.068,108.204
  Top Layer w0.15: R9.2 81.831,113.5 85.331,110.001 85.331,107.088 87.863,104.556 90.413,104.556 91.264,103.704 J1.3
USB_CONNECT: Q3.2 U5.49 | length 30.8
  Top Layer w0.25: Q3.2@90.1,105.34 v1(90.1,106.1) ; U5.49 98.523,123.202 v1(100,121.725)
  Bottom Layer w0.25: v1(90.1,106.1) 90.1,110.1 92.35,112.35 95.475,112.35 100.325,117.2 100.325,121.4 v1(100,121.725)
USB_H_N: C15.1 R8.1 U5.22 | length 5.4
  Top Layer w0.119: v1@79.632,114.468 R8.1 80.974,115.81 81.335,115.81 81.627,116.102 U5.22@81.627,117.377
  Bottom Layer w0.119: C15.1@78.614,113.411 C15.1@79.248,113.411 ; C15.1@79.4,113.563 v1(79.4,114.4)
USB_H_P: C18.1 R9.1 U5.23 | length 4.7
  Top Layer w0.119: R9.1@81.788,114.887 R9.1 ; U5.23@82,117.3 82,115.893 81.788,115.681 R9.1 ; v1(82.75,114.45) 82.1,115.1 R9.1
  Bottom Layer w0.119: C18.1@81.811,114.45 v1(82.75,114.45)
USB_UP_LED: D3.2 U5.25 | length 15.3
  Top Layer w0.25: U5.25 83.102,115.048 v2(83.85,114.3) ; v2(87.7,114.3) 91.416,114.3 D3.2
  Bottom Layer w0.25: v2(83.85,114.3) v2(87.7,114.3)
USB_VBUS: R25.1 U5.18 | length 29.9
  Top Layer w0.25: U5.18 80.702,120.202 v1(82.5,122) ; v1(89,115.5) 88.6,115.5 88.049,114.949 87.374,114.949 87,114.575 87,113.9 v2(89.925,110.975)
  Bottom Layer w0.25: v1(82.5,122) 82.9,121.6 88.289,121.6 89.45,120.439 89.45,115.95 v1(89,115.5) ; R25.1 86.36,107.435 v2@89.9,110.975 ; v2@89.913,110.987 v2@89.9,110.975 ; v2(89.925,110.975) v2@89.9,110.975
WAKE_ENABLE: P8.6 U5.54 | length 23.6
  Top Layer w0.25: v1(90.9,125.702) U5.54
  Bottom Layer w0.25: v1(90.9,125.702) 91.147,125.702 93.649,123.2 99.525,123.2 101.05,121.675 103.075,121.675 104,122.6 104,126.188 P8.6
pads on no net: P1. P2. P3.7 P4. P7. P8. P8.1 U1.5 U5.6 U5.7 U5.11 U5.13 U5.15 U5.17 U5.30 U5.31 U5.32 U5.35 U5.36 U5.44 U5.45 U5.46 U5.47 U5.48 U5.52 U5.53 U5.65 U5.69 U5.70 U5.71 U5.72 U5.73 U5.74 U5.75 U5.76 U5.79 U5.80 Y1.3 Y1.4

## Polygon pours and split planes (outlines as drawn)
GND on Top Layer "Top Layer-No Net" (solid, pour order 1000): 75.227,112.234 75.227,100.534 67.827,100.534 67.959,100.634 67.959,112.234
GND on Internal Plane 1 (split plane): 109.498,97.502 96.976,97.502 96.976,103.9 96.971,103.929 96.964,103.939 96.954,103.954 95.854,105.054 95.829,105.071 95.8,105.076 89.3,105.076 89.271,105.071 89.261,105.064 89.246,105.054 85.646,101.454 85.629,101.429 85.624,101.4 85.624,97.502 50.202,97.502 50.202,103.573 69.7,103.573 69.749,103.582 69.79,103.61 71.39,105.21 71.418,105.251 71.427,105.3 71.427,107.4 71.419,107.441 71.418,107.449 71.39,107.49 69.99,108.89 69.949,108.918 69.9,108.927 64.053,108.927 60.427,112.553 60.427,134.598 109.498,134.598
GND on Internal Plane 1 (split plane): 60.173,112.5 60.182,112.451 60.21,112.41 63.91,108.71 63.951,108.682 64,108.673 69.847,108.673 71.173,107.347 71.173,105.353 69.647,103.827 50.202,103.827 50.202,134.598 60.173,134.598
GND on Internal Plane 1 (split plane): 96.824,103.868 96.824,97.502 85.776,97.502 85.776,101.368 89.332,104.924 95.768,104.924
+3.3 on Internal Plane 2 (split plane): 59.373,131.212 58.294,132.29 58.253,132.318 58.204,132.327 53.5,132.327 53.451,132.318 53.41,132.29 52.21,131.09 52.182,131.049 52.173,131 52.173,126.6 52.182,126.551 52.21,126.51 53.21,125.51 53.623,125.097 53.623,121.95 53.632,121.901 53.66,121.86 56.81,118.71 60.973,114.547 60.973,105 60.982,104.951 61.01,104.91 62.21,103.71 62.251,103.682 62.3,103.673 64,103.673 64.049,103.682 64.09,103.71 65.09,104.71 65.118,104.751 65.127,104.8 65.127,111.5 65.127,113.8 65.118,113.849 65.09,113.89 63.39,115.59 62.527,116.453 62.527,120.9 62.527,126.398 62.551,126.382 62.6,126.373 65.747,126.373 67.71,124.41 67.738,124.391 67.751,124.382 67.8,124.373 70.7,124.373 70.749,124.382 70.79,124.41 70.94,124.56 71.39,125.01 71.418,125.051 71.427,125.1 71.427,131.073 96.847,131.073 100.173,127.747 100.173,125.7 100.173,106.427 73.8,106.427 73.751,106.418 73.71,106.39 73.682,106.349 73.673,106.3 73.673,104.953 68.747,100.027 58.553,100.027 55.413,103.167 53.163,105.417 53.122,105.445 53.073,105.454 50.202,105.454 50.202,134.598 59.373,134.598
+5 on Internal Plane 2 (split plane): 109.498,97.502 50.202,97.502 50.202,105.199 53.02,105.199 55.233,102.987 58.41,99.81 58.451,99.782 58.459,99.781 58.5,99.773 68.8,99.773 68.849,99.782 68.89,99.81 73.89,104.81 73.918,104.851 73.927,104.9 73.927,106.173 100.3,106.173 100.349,106.182 100.39,106.21 100.418,106.251 100.427,106.3 100.427,125.7 100.427,127.8 100.418,127.849 100.39,127.89 96.99,131.29 96.949,131.318 96.9,131.327 71.3,131.327 71.251,131.318 71.21,131.29 71.182,131.249 71.173,131.2 71.173,125.153 70.76,124.74 70.647,124.627 67.853,124.627 65.89,126.59 65.849,126.618 65.8,126.627 62.6,126.627 62.551,126.618 62.527,126.602 62.518,126.649 62.49,126.69 59.627,129.553 59.627,130.904 59.627,134.598 109.498,134.598
CAN_POWER on Internal Plane 2 (split plane): 59.373,130.851 59.373,129.5 59.382,129.451 59.41,129.41 62.273,126.547 62.273,126.5 62.273,120.9 62.273,116.4 62.282,116.351 62.31,116.31 63.21,115.41 64.873,113.747 64.873,111.5 64.873,104.853 63.947,103.927 62.353,103.927 61.227,105.053 61.227,114.6 61.218,114.649 61.19,114.69 56.99,118.89 53.877,122.003 53.877,125.15 53.868,125.199 53.84,125.24 53.39,125.69 52.427,126.653 52.427,130.947 53.553,132.073 58.151,132.073

## Other copper
Top Layer:
  region net CAN_POWER: 67.85,107.05 67.85,106.25 64.85,106.25 63.95,104.15 62.95,104.15 62.95,108.95 64.25,108.95 64.85,107.05
  region net GND: 62.5,109 62.5,104.2 60.4,104.2 60.4,109
  region net NetC21_1: 56.6,112.9 56.5,112.8 56.5,106.6 60,106.6 60.2,106.8 60.2,109.3 64.5,109.3 65.1,107.3 66.7,107.3 66.7,107.6 65.6,107.6 65.6,109.1 66.6,110 66.6,111 64.8,111 64.8,112.9
  region net NetD2_1: 61.9,116.475 61.9,113.65 65.9,113.65 67.2,112.35 67.2,108.45 67.8,108.45 67.8,116.475
  region net NetC22_1: 66.5,106.1 65.1,106.1 64.6,105 64,103.8 60.1,103.8 60,103.9 60,105.9 56.5,105.9 56.5,99.4 60,99.4 60.4,99.8 60.4,100.9 64,100.9 64.6,101.5 64.6,102.5 65.9,102.5 65.9,104 65.6,104.3 65.6,105.8 66.5,105.8
  region net NetD3_1: 61,97.2 61,100.5 65.6,100.5 66.5,101.4 66.5,104.8 66.6,104.9 67.4,104.9 67.4,97.2
  region net +5: 54,99.7 51.7,99.7 51.7,102.6 54,102.6
  region net +5: 50.35,104.5 53.3,104.5 53.3,99.7 50.35,99.65 50.375,102.1
  region net +3.3: 50.5,108.275 55.8,108.3 55.8,112.6 50.5,112.6
Internal Plane 1 (plane layer: these items are gaps in the copper):
  lines w0.15: 85.7,97 85.7,101.4 89.3,105 93.9,105 95.8,105 96.9,103.9 96.9,97
  lines w0.25: 49.7,103.7 69.7,103.7 71.3,105.3 71.3,107.4 69.9,108.8 64,108.8 60.3,112.5 60.3,135.1
Internal Plane 2 (plane layer: these items are gaps in the copper):
  lines w0.15: 62.4,126.5 62.6,126.5 ; 62.6,126.5 62.6,126.5
  lines w0.25: 49.727,105.327 53.073,105.327 55.323,103.077 58.5,99.9 68.8,99.9 73.8,104.9 73.8,106.3 91.4,106.3 96.4,106.3 100.3,106.3 100.3,125.7 100.3,127.8 96.9,131.2 71.3,131.2 71.3,125.1 70.85,124.65 70.7,124.5 67.8,124.5 65.8,126.5 64.1,126.5 62.6,126.5 ; 59.5,135.1 59.5,130.904 ; 60.9,135.1 67.3,135.1 ; 59.5,130.904 59.5,129.5 62.4,126.6 62.4,126.5 62.4,120.9 62.4,116.4 63.3,115.5 65,113.8 65,111.5 65,104.8 64,103.8 62.3,103.8 61.1,105 61.1,114.6 56.9,118.8 53.75,121.95 53.75,125.15 53.3,125.6 52.3,126.6 52.3,131 53.5,132.2 58.204,132.2 59.5,130.904

## Silkscreen, mask and mechanical layers (free items; w line width, h text height)
Bottom Overlay:
  text "GND" at 55.2,131.675 h1
  text "RESET" at 107.5,130.075 h1
  text "+V" at 55.15,130.05 h1
  text "N" at 54.775,128.125 h1
  text "WAKE" at 106.45,128.025 h1
  text "INTR" at 106.225,126.1 h1
  text "P" at 54.775,126.075 h1
  text "POWER" at 107.4,124.25 h1
  text "PS_ON" at 107.425,122.075 h1
  text "SECO" at 108.7,120.925 h1.52 r90
  text "CAN" at 55.15,117.925 h1.52
  text "IF TERMINATING" at 64.475,111.075 h1
  text "RESET" at 108,110.85 h1
  text "POPULATE R1" at 64.575,109.15 h1
  text "WITH 120R" at 64.675,107.225 h1
  text "POWER" at 107.1,106.775 h1
  text "PANDA" at 109.05,105.175 h1.52 r90
  text "PS/2" at 74.4,104.175 h1.52 r90
  text "LED1" at 105.9,102.875 h1
  text "GND" at 84.275,100.6 h1 r90
  text "DAT" at 82.275,100.575 h1 r90
  text "CLK" at 80.2,100.525 h1 r90
  text "+5" at 78.25,100.5 h1 r90
  text "LED2" at 106.325,99.2 h1

## Text inside footprints (layer, text, board x,y; h text height)
P1: Top Overlay "JST  PA" at 53.112,114.116 h2.5 r90
P2: Top Overlay "JST  PA" at 53.112,125.292 h2.5 r90
P3: Top Overlay "10" at 61.9,128.762 h1; Top Overlay "9" at 62.725,132.712 h1; Top Overlay "2" at 69.95,128.762 h1; Top Overlay "1" at 69.95,132.712 h1
P4: Top Overlay "JST  PA" at 84.924,100.356 h2.5 r180
P7: Top Overlay "JST  PA" at 106.4,110.384 h2.5 r270
P8: Top Overlay "JST  PA" at 106.4,129.688 h2.5 r270